# Altium PCB PCB.PcbDoc
Units mil, origin at the board's own origin, x right, y up, seen from the top; angles counter-clockwise.
Board outline 6000 x 4000 mil, 2 copper layers (Top Layer, Bottom Layer); 28 components, 16 nets, 56 pads, 0 vias.
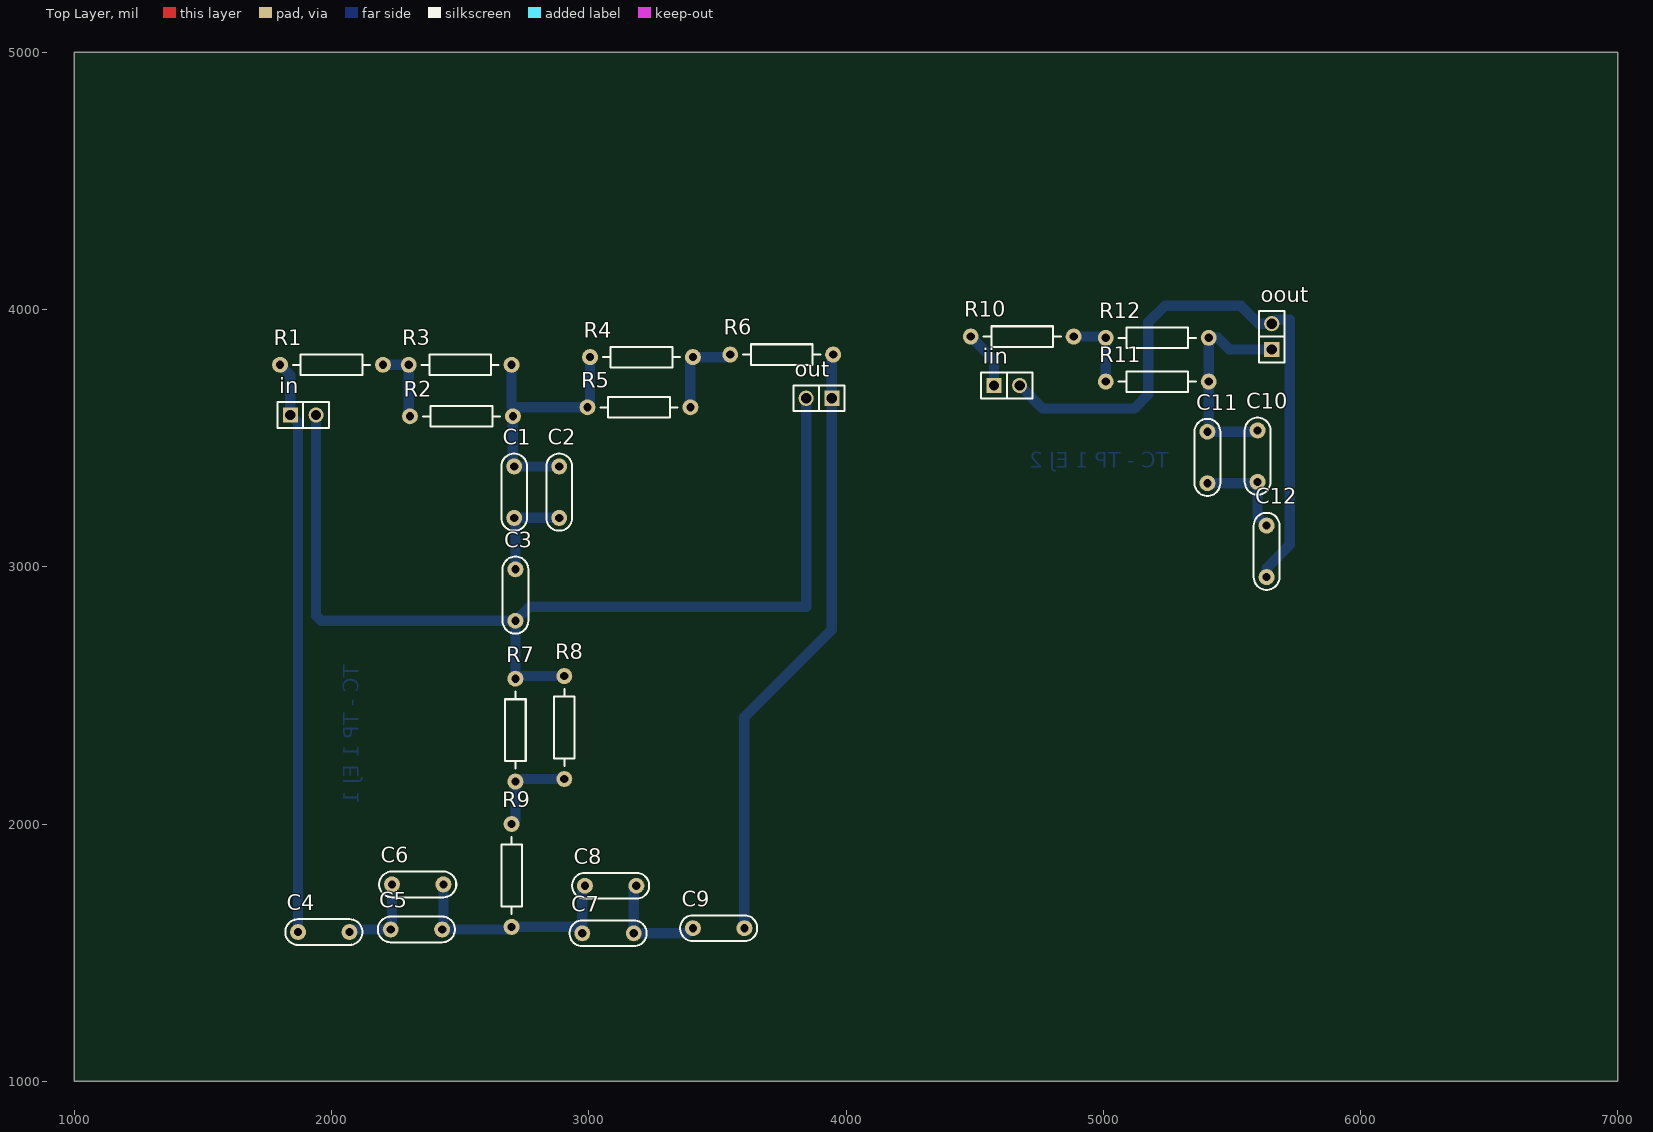
[diagram p0: Top Layer view]
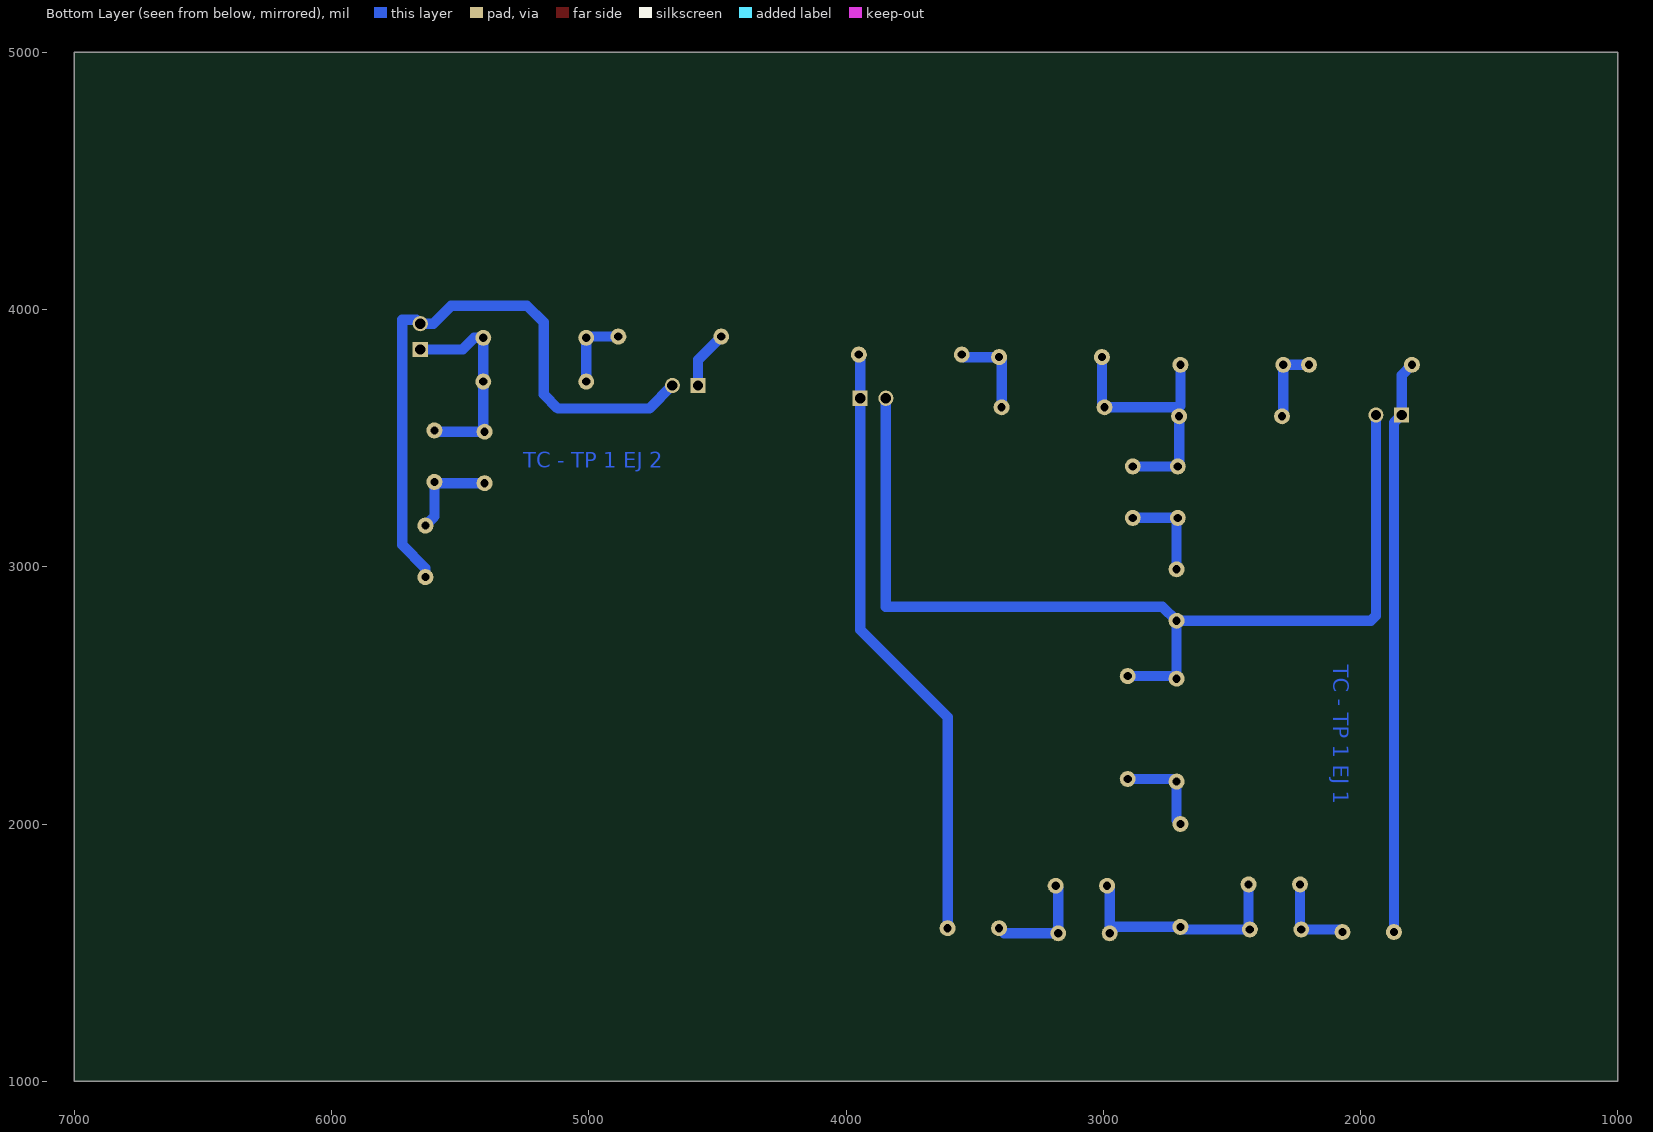
[diagram p1: Bottom Layer view, seen from below]
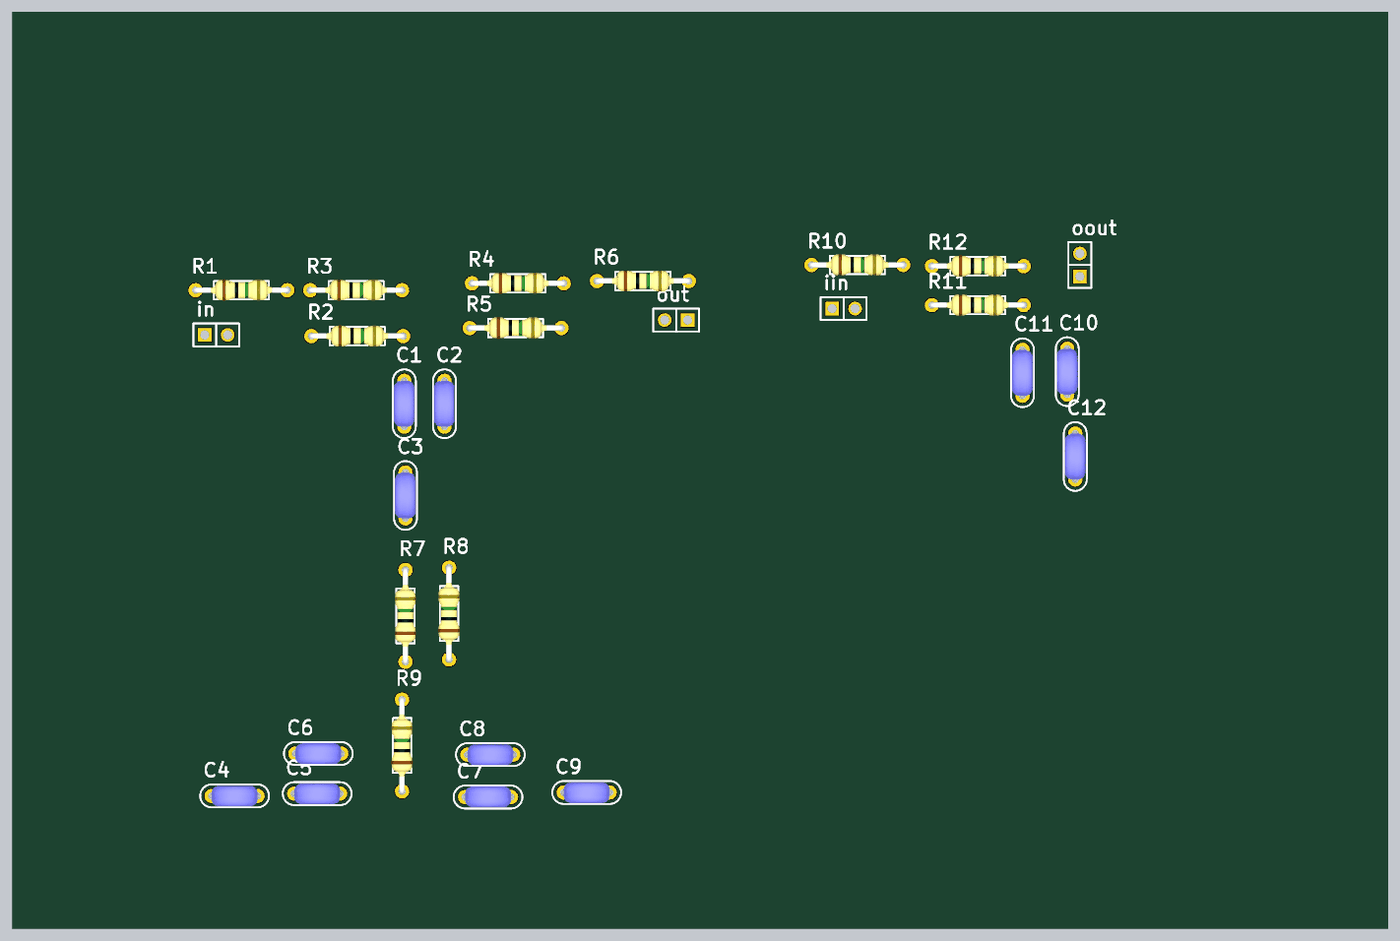
[diagram p2: 3D render of the assembled board from above, using the file's embedded part models]

## Layer stack, top to bottom
Top Solder: solder mask 0.4, Solder Resist, Dk 3.5
Top Layer: signal copper 1.4
Dielectric 1: dielectric 12.6, FR-4, Dk 4.8
Bottom Layer: signal copper 1.4
Bottom Solder: solder mask 0.4, Solder Resist, Dk 3.5

## Board outline
1000,1000 7000,1000 7000,5000 1000,5000

## Design rules (kind name [scope] priority, off if disabled: settings)
Clearance [All] p1: gap=10 ignorepadtopadclearanceinfootprint=FALSE except(0: Arc-Hole Track-Hole SMDPad-Hole THPad-Hole Via-Hole Fill-Hole Poly-Hole Region-Hole Text-Hole)
PolygonConnect [All] p1: connectstyle=Relief reliefconductorwidth=10 reliefentries=4 polygonreliefangle="90 Angle" airgapwidth=10
RoomDefinition esquematico [InComponentClass('esquematico')] p1: confinementstyle=ConfineIn formatcopy=TRUE lockcomponents=FALSE outline 1455,1470 5840,1470 5840,4190 1455,4190
RoutingVias [All] p1: holewidth=28 width=50 viastyle="Through Hole" minholewidth=28 minwidth=50 maxholewidth=28 maxwidth=50
SolderMaskExpansion [All] p1: expansion=4
Width [All] p1: maxlimit=40 minlimit=40 preferedwidth=40
30 further rules are at their usual default settings.

## Components (designator, comment, footprint, x,y, rotation, side; value= is the part's Value field where it differs from the comment)
C1 "CAP" CAP200 2710,3290 r270 top
C2 "CAP" CAP200 2885,3290 r270 top
C3 "CAP" CAP200 2715,2890 r270 top
C4 "CAP" CAP200 1970,1580 r0 top
C5 "CAP" CAP200 2330,1590 r0 top
C6 "CAP" CAP200 2335,1765 r0 top
C7 "CAP" CAP200 3075,1575 r180 top
C8 "CAP" CAP200 3085,1760 r0 top
C9 "CAP" CAP200 3505,1595 r0 top
C10 "CAP" CAP200 5600,3430 r270 top
C11 "CAP" CAP200 5405,3425 r270 top
C12 "CAP" CAP200 5635,3060 r270 top
iin "CON2" SIP2 4625,3705 r0 top
in "CON2" SIP2 1890,3590 r0 top
oout "CON2" SIP2 5655,3895 r90 top
out "CON2" SIP2 3895,3655 r180 top
R1 "RES" RES400 1800,3785 r0 top
R2 "RES" RES400 2305,3585 r0 top
R3 "RES" RES400 2300,3785 r0 top
R4 "RES" RES400 3005,3815 r0 top
R5 "RES" RES400 2995,3620 r0 top
R6 "RES" RES400 3550,3825 r0 top
R7 "RES" RES400 2715,2165 r90 top
R8 "RES" RES400 2905,2175 r90 top
R9 "RES" RES400 2700,1600 r90 top
R10 "RES" RES400 4485,3895 r0 top
R11 "RES" RES400 5010,3720 r0 top
R12 "RES" RES400 5010,3890 r0 top

## Footprints (in the part's own frame and the unit in brackets; to place one, negate y for a bottom-side part, rotate by r counter-clockwise, add the part's x,y. Pads: shape width x height; smd on the part's side, far side on the other; paste and mask are expansions set on the pad)
CAP200 [mil]
  round 62 hole 32: 1(-100,0) 2(100,0)
  silkscreen extent -150,-50 150,50, body extent -110,-46 110,44, height 246
RES400 [mil]
  round 62 hole 32: 1(0,0) 2(400,0)
  silkscreen extent 50,-40 350,40, body extent -12,-45 412,46, height 96
SIP2 [mm]
  rect 1.5x1.5 hole 1.016: 1(-1.27,0)
  round 1.5 hole 1.016: 2(1.27,0)
  silkscreen extent -2.54,-1.27 2.54,1.27

## Nets (pads, with @x,y where several pads share a name; then routed paths per layer and width w, separated by ;. In a path a pad name is that pad's centre, name@x,y a point inside that pad or via, vN(x,y) a via of type N, cw(c..) or ccw(c..) an arc to the next point about the centre after c; other vN are vias at no path point)
NetC1_1: C1.1 C2.1 R2.2 R3.2 R4.1 R5.1 | length 1028.3
  Bottom Layer w40: R3.2 2700,3625 2705,3620 R5.1 3005,3630 R4.1 ; R2.2 2705,3395 C1.1 C2.1
NetC1_2: C1.2 C2.2 C3.1 | length 377.1
  Bottom Layer w40: C3.1 2715,3185 C1.2 C2.2
NetC3_2: C3.2 in.2 out.2 R7.2 R8.2 | length 3945.2
  Bottom Layer w40: in.2 1940,2810 1960,2790 C3.2 ; R8.2 2725,2575 R7.2 C3.2 ; out.2 3845,2845 2770,2845 C3.2
NetC4_1: C4.1 in.1 R1.1 | length 2234
  Bottom Layer w40: R1.1 1840,3745 in.1 1870,3560 C4.1
NetC4_2: C4.2 C5.1 C6.1 | length 341.2
  Bottom Layer w40: C4.2 2080,1590 C5.1 2235,1595 C6.1
NetC5_2: C5.2 C6.2 C7.2 C8.1 R9.1 | length 925.7
  Bottom Layer w40: C6.2 2435,1595 C5.2 2690,1590 R9.1 2950,1600 C7.2 2975,1750 C8.1
NetC7_1: C7.1 C8.2 C9.1 | length 427.4
  Bottom Layer w40: C8.2 3175,1750 C7.1 3385,1575 C9.1
NetC9_2: C9.2 out.1 R6.2 | length 2372.9
  Bottom Layer w40: C9.2 3605,2415 3945,2755 out.1 3945,3820 R6.2
NetC10_1: C10.1 C11.1 oout.1 R11.2 R12.2 | length 827.8
  Bottom Layer w40: C10.1 5595,3525 C11.1 5410,3530 R11.2 R12.2 5445,3890 5490,3845 oout.1
NetC10_2: C10.2 C11.2 C12.1 | length 381.6
  Bottom Layer w40: C11.2 5595,3325 C10.2 5600,3195 C12.1
NetC12_2: C12.2 iin.2 oout.2 | length 2489.5
  Bottom Layer w40: iin.2 4765,3615 5120,3615 5175,3670 5175,3950 5240,4015 5535,4015 5605,3945 oout.2 5670,3960 5725,3960 5725,3085 5635,2995 C12.2
Netiin_1: iin.1 R10.1 | length 227.3
  Bottom Layer w40: R10.1 4575,3805 iin.1
NetR1_2: R1.2 R2.1 R3.1 | length 302.1
  Bottom Layer w40: R1.2 R3.1 2300,3590 R2.1
NetR4_2: R4.2 R5.2 R6.1 | length 348.3
  Bottom Layer w40: R5.2 3395,3805 R4.2 3540,3815 R6.1
NetR7_1: R7.1 R8.1 R9.2 | length 365.4
  Bottom Layer w40: R9.2 2715,2015 R7.1 2725,2175 R8.1
NetR10_2: R10.2 R11.1 R12.1 | length 297.1
  Bottom Layer w40: R10.2 5005,3895 R12.1 R11.1

## Other copper
Bottom Layer:
  text "TC - TP 1 EJ 2" at 5255,3385 h60
  text "TC - TP 1 EJ 1" at 2105,2620 h60 r90